# Altium PCB PCB.PcbDoc
Units mil, origin at the board's own origin, x right, y up, seen from the top; angles counter-clockwise.
Board outline 6000 x 4000 mil, 4 copper layers (Top Layer, Int1 (GND), Int2 (PWR), Bottom Layer), stack 53.912 mil thick; 50 components, 40 nets, 243 pads, 0 vias.
Unrouted connection lines stored in the file: 172.
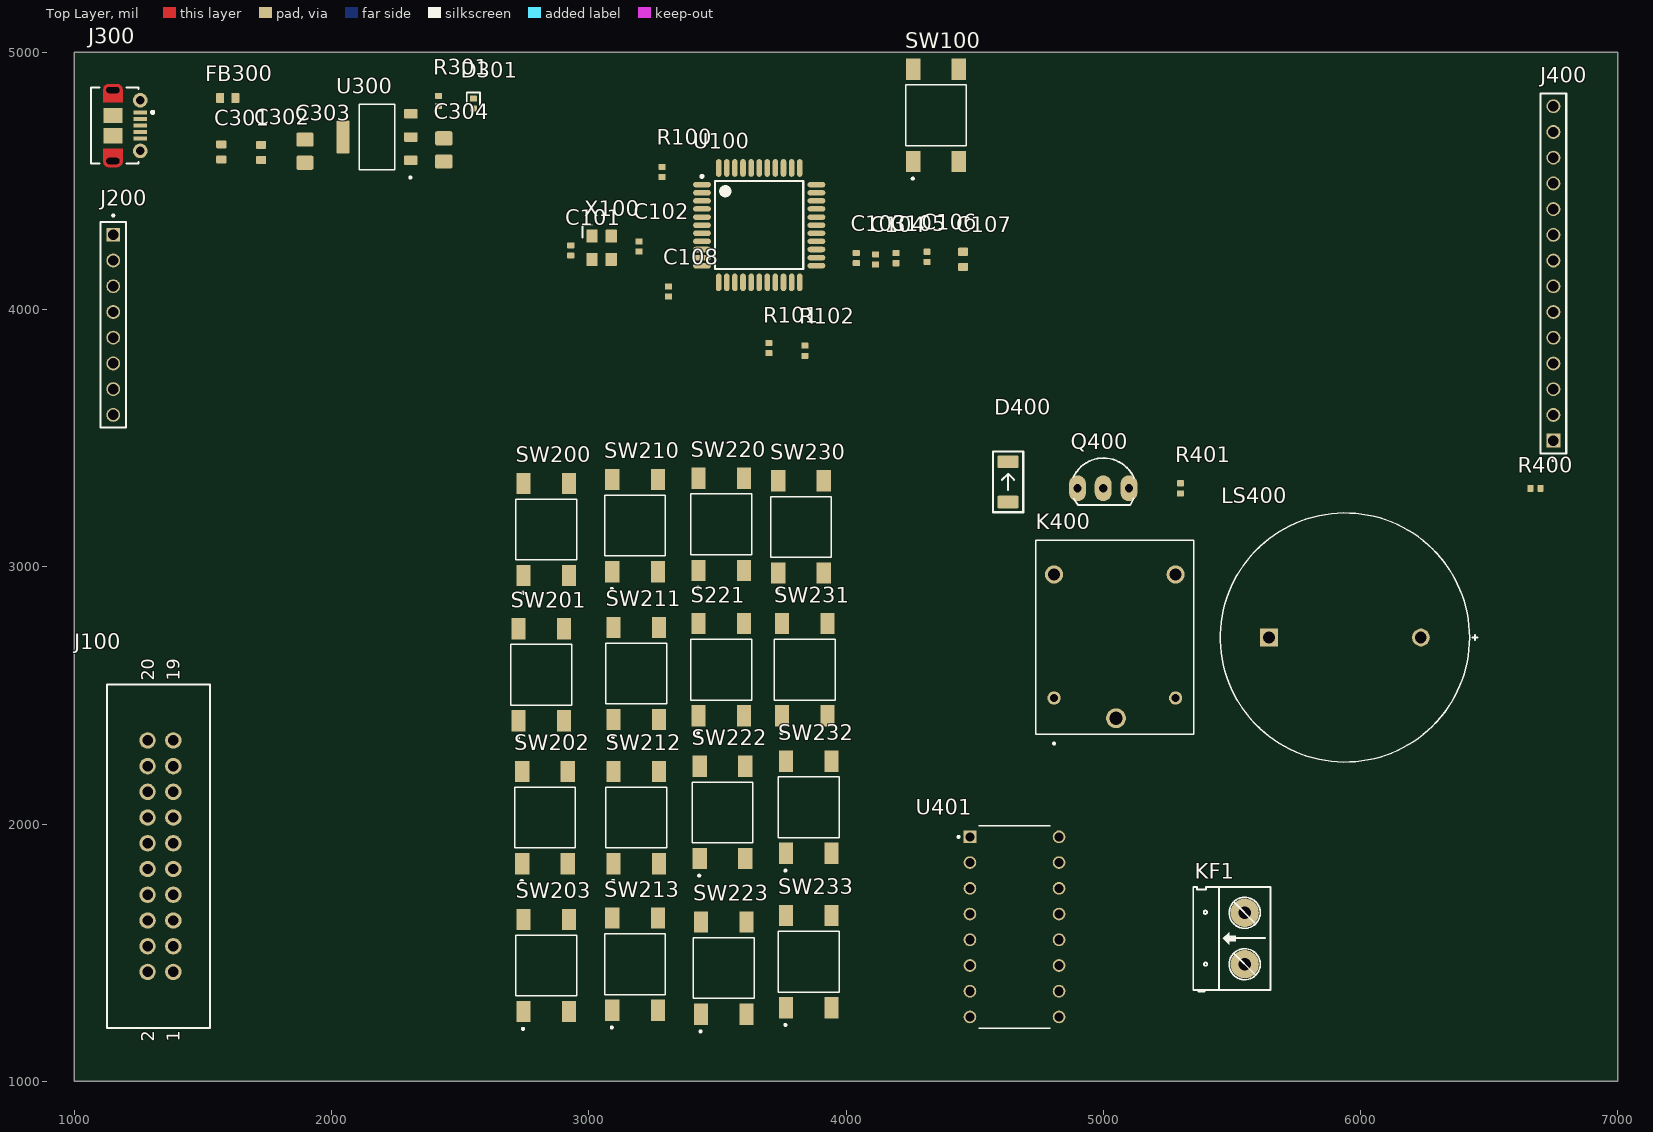
[diagram p0: Top Layer view]
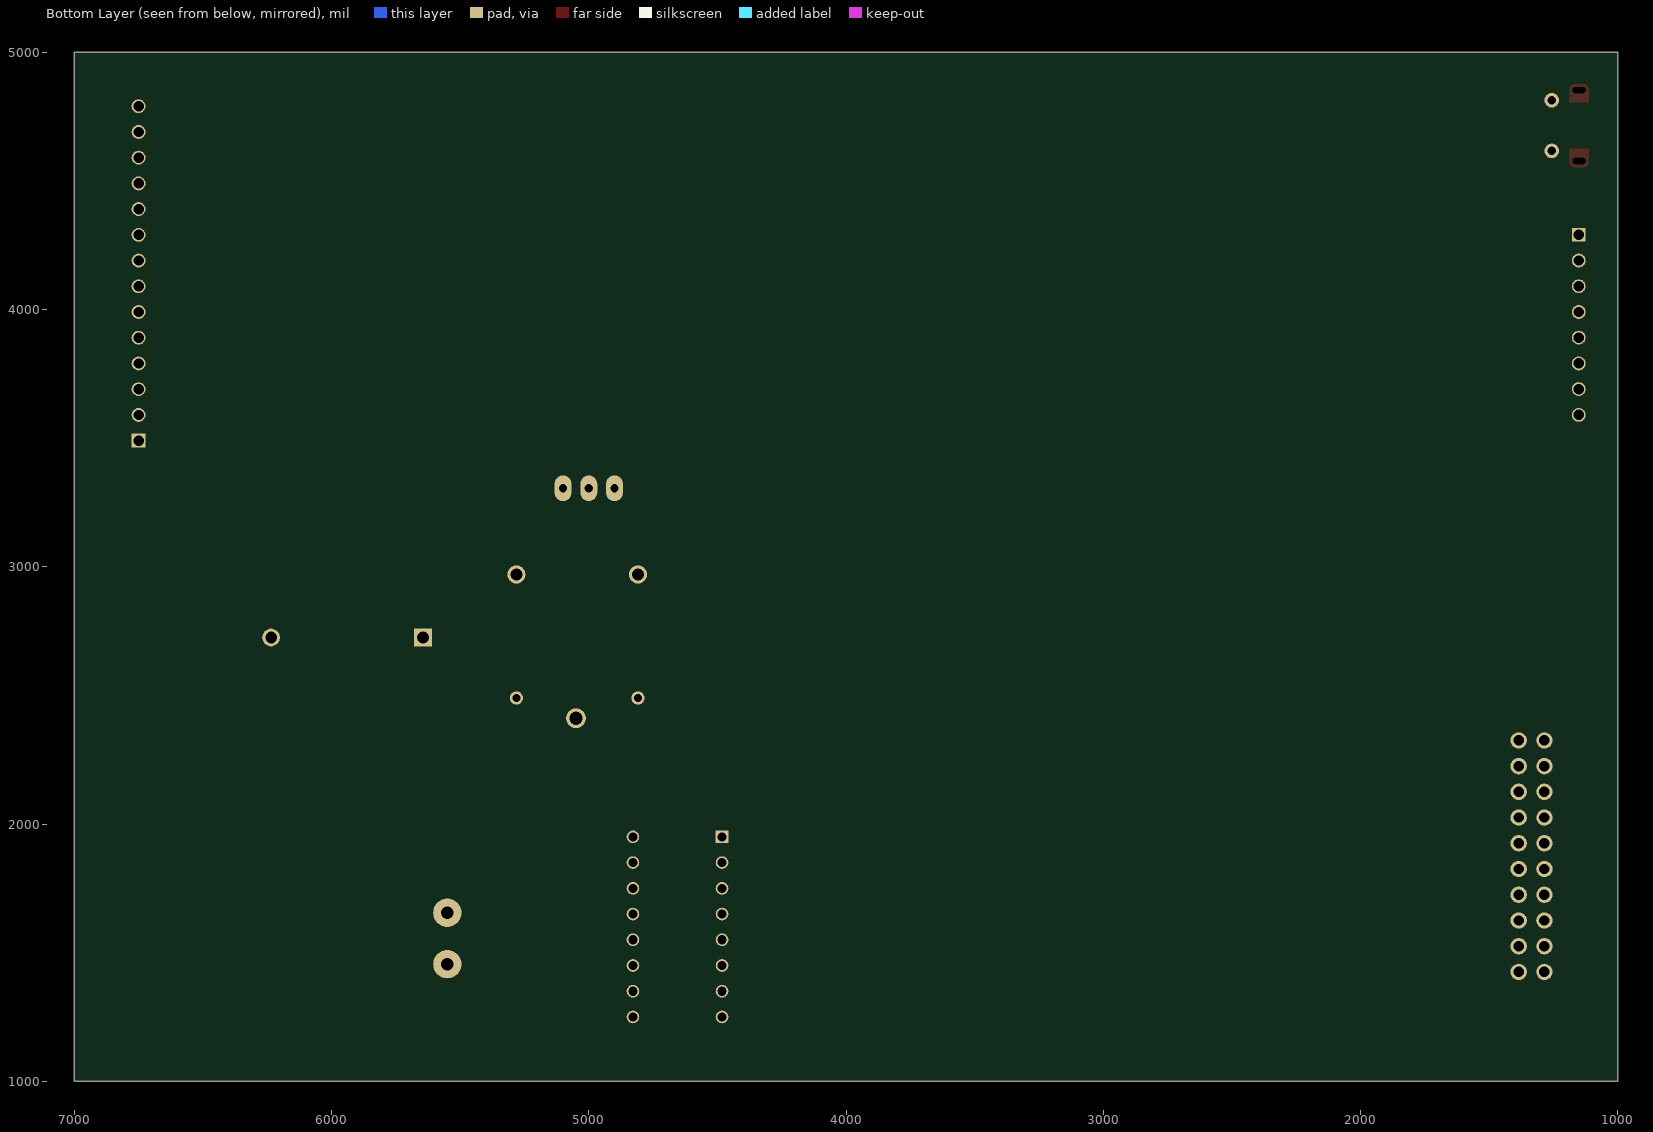
[diagram p1: Bottom Layer view, seen from below]
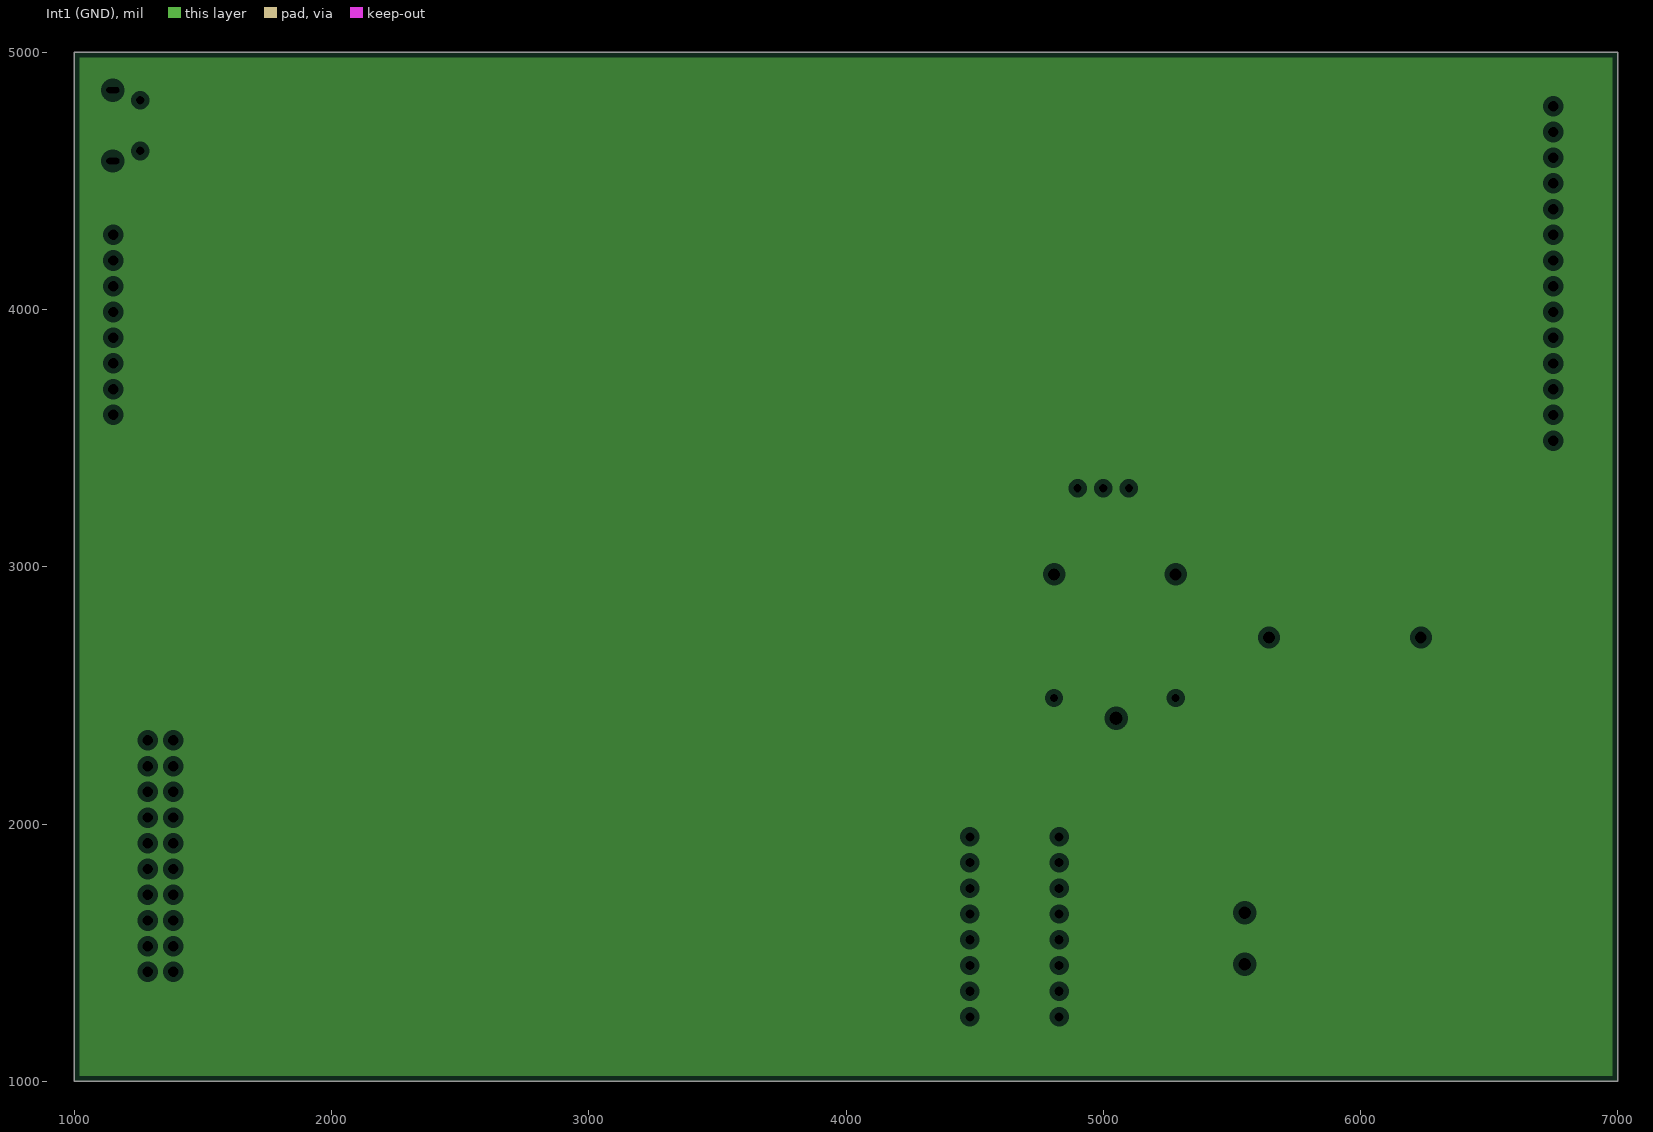
[diagram p2: Int1 (GND), clearances drawn from the general rule]
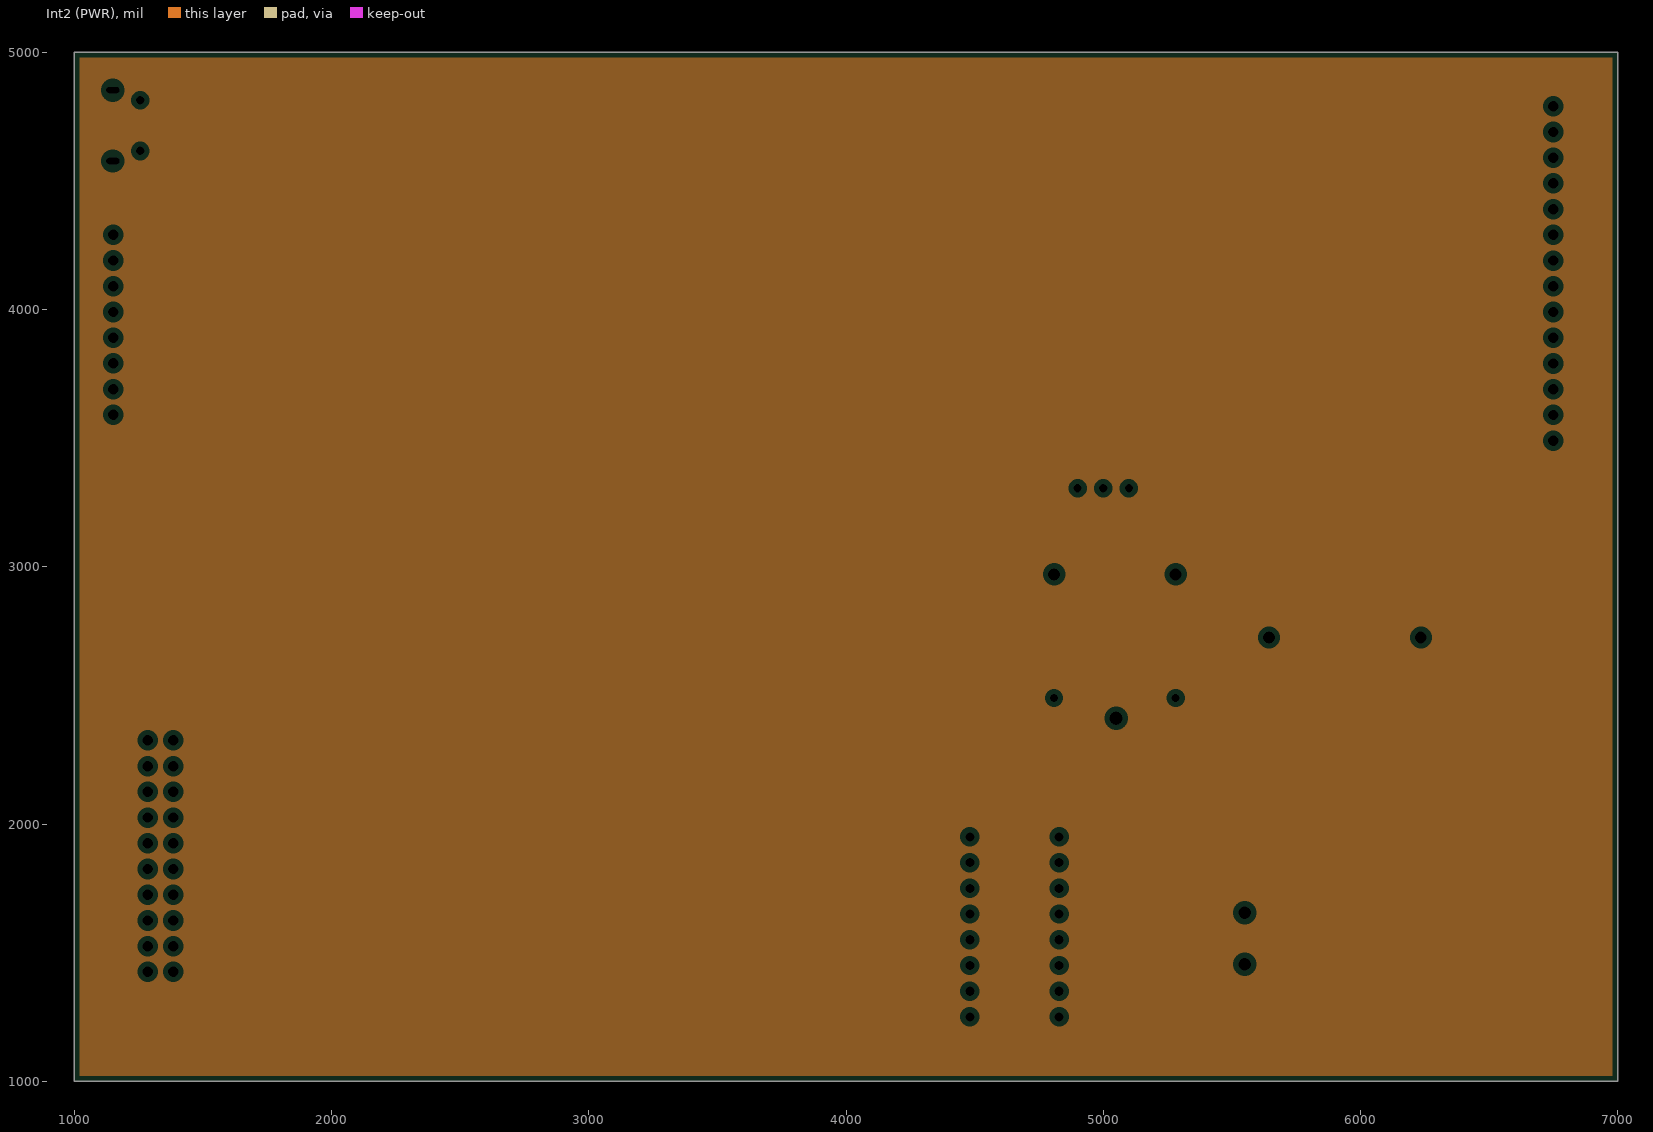
[diagram p3: Int2 (PWR), clearances drawn from the general rule]

## Layer stack, top to bottom
Top Solder: solder mask 1, SM-001, Dk 4
Top Layer: signal copper 1.378
Dielectric 1: prepreg 5.1, PP-017, Dk 4.3
Dielectric 2: prepreg 5.1, PP-017, Dk 4.3
Int1 (GND): plane copper 1.378
Dielectric 3: core 28, Core-039, Dk 4.8
Int2 (PWR): plane copper 1.378
Dielectric 4: prepreg 5.1, PP-017, Dk 4.3
Dielectric 5: prepreg 5.1, PP-017, Dk 4.3
Bottom Layer: signal copper 1.378
Bottom Solder: solder mask 1, SM-001, Dk 4

## Board outline
1000,1000 7000,1000 7000,5000 1000,5000

## Design rules (kind name [scope] priority, off if disabled: settings)
Clearance [All] p1: gap=10 ignorepadtopadclearanceinfootprint=FALSE except(0: Arc-Hole Track-Hole SMDPad-Hole THPad-Hole Via-Hole Fill-Hole Poly-Hole Region-Hole Text-Hole)
PlaneClearance [All] p1: clearance=20
PlaneConnect [All] p1: planeconnectstyle=Relief reliefexpansion=20 reliefentries=4 reliefconductorwidth=10 reliefairgap=10
PolygonConnect [All] p1: connectstyle=Relief reliefconductorwidth=10 reliefentries=4 polygonreliefangle="90 Angle" airgapwidth=10
RoomDefinition SCHEMATIC [InComponentClass('SCHEMATIC')] p1: confinementstyle=ConfineIn formatcopy=TRUE lockcomponents=FALSE outline 960,820.55 6945,820.55 6945,5005.55 960,5005.55
RoutingVias [All] p1: holewidth=28 width=50 viastyle="Through Hole" minholewidth=28 minwidth=50 maxholewidth=28 maxwidth=50
SolderMaskExpansion [All] p1: expansion=4 istentingtop=FALSE
Width [All] p1: maxlimit=10 minlimit=10 preferedwidth=10
28 further rules are at their usual default settings.

## Components (designator, comment, footprint, x,y, rotation, side; value= is the part's Value field where it differs from the comment)
C101 "C0402" CAP_0402 2930,4230 r90 top
C102 "C0402" CAP_0402 3195,4245 r270 top
C103 "C0402" CAP_0402 4040,4200 r270 top
C104 "C0402" CAP_0402 4115,4195 r270 top
C105 "C0402" CAP_0402 4195,4199.69 r270 top
C106 "C0402" CAP_0402 4315,4205 r270 top
C107 "C0603" CAP_0603 4455,4195 r270 top
C108 "C0402" CAP_0402 3310,4070.31 r90 top
C301 "2.2u" CAP_0603 1571.42,4612.72 r90 top
C302 "2.2u" CAP_0603 1726.42,4610.55 r90 top
C303 "22u" CAP_0805 1896.42,4615.55 r90 top
C304 "22u" CAP_0805 2436.42,4620.55 r90 top
D301 "GREEN" LED_0402_GREEN 2551.42,4800.55 r90 top
D400 "D_SMA" "DO-214AC-2 (SMA)" 4630,3330 r90 top
FB300 "120R" FB_0603 1596.42,4822.24 r0 top
J100 "SAMTEC-TST-110-01-X-D" SAMTEC-TST-110-01-X-D 1327.52,1875 r90 top
J200 "HEADER_RFID" SAMTEC_TSW-108-X-X-S 1151.42,3940.55 r90 top
J300 "105017-0001" USB-MICRO-B_V 1203.27,4715.24 r270 top
J400 "HEADER_LCD" SAMTEC_TSW-114-07-L-S 6750,4140.31 r90 top
K400 "SRD-12VDC-SL-C" RELAY_SRD-12VDC-SL-C 5045,2730 r90 top
KF1 "CON 2 KF301" "Con 2 KF301 5.08" 5550,1455 r90 top
LS400 "PKB24SPCH3601-B0" FP-PKB24SPCH3601-B0-MFG 5939.72,2725 r0 top
Q400 "NPN" TO92 5000,3305 r0 top value=C9014
R100 "1k" RES_0402 3285,4535 r90 top
R101 "R0402" RES_0402 3700,3850 r90 top
R102 "R0402" RES_0402 3840,3839.68 r90 top
R301 "1k" RES_0402 2416.42,4810.55 r90 top
R400 "R0402" RES_0402 6680,3305 r180 top
R401 "R0402" RES_0402 5300,3305 r270 top
S221 "3-1437565-0" SW_3-1437565-0 3515,2600 r90 top
SW100 "3-1437565-0" SW_3-1437565-0 4350,4755 r90 top
SW200 "3-1437565-0" SW_3-1437565-0 2835,3145 r90 top
SW201 "3-1437565-0" SW_3-1437565-0 2815,2580 r90 top
SW202 "3-1437565-0" SW_3-1437565-0 2830,2025 r90 top
SW203 "3-1437565-0" SW_3-1437565-0 2835,1450 r90 top
SW210 "3-1437565-0" SW_3-1437565-0 3180,3160 r90 top
SW211 "3-1437565-0" SW_3-1437565-0 3185,2585 r90 top
SW212 "3-1437565-0" SW_3-1437565-0 3185,2025 r90 top
SW213 "3-1437565-0" SW_3-1437565-0 3180,1455 r90 top
SW220 "3-1437565-0" SW_3-1437565-0 3515,3165 r90 top
SW222 "3-1437565-0" SW_3-1437565-0 3520,2045 r90 top
SW223 "3-1437565-0" SW_3-1437565-0 3525,1440 r90 top
SW230 "3-1437565-0" SW_3-1437565-0 3825,3155 r90 top
SW231 "3-1437565-0" SW_3-1437565-0 3840,2600 r90 top
SW232 "3-1437565-0" SW_3-1437565-0 3855,2065 r90 top
SW233 "3-1437565-0" SW_3-1437565-0 3855,1465 r90 top
U100 "ATmega32-16AU" 44A_N 3662.56,4327.99 r0 top
U300 "AMS1117-5.0" SOT229P700X180-4N 2176.42,4670.55 r90 top
U401 "L293D" DIP880W50P254L2000H510Q16 4655,1600 r0 top
X100 "24MHz" XTAL_3225 3050,4240 r270 top

## Footprints (in the part's own frame and the unit in brackets; to place one, negate y for a bottom-side part, rotate by r counter-clockwise, add the part's x,y. Pads: shape width x height; smd on the part's side, far side on the other; paste and mask are expansions set on the pad)
44A_N [mm] "Thin QFP, 44-Leads, Body 10x10mm, Pitch 0.8mm, IPC Medium Density"
  oval 1.75x0.55 smd: 1(-5.65,4) 2(-5.65,3.2) 3(-5.65,2.4) 4(-5.65,1.6) 5(-5.65,0.8) 6(-5.65,0) 7(-5.65,-0.8) 8(-5.65,-1.6) 9(-5.65,-2.4) 10(-5.65,-3.2) 11(-5.65,-4) 23(5.65,-4) 24(5.65,-3.2) 25(5.65,-2.4) 26(5.65,-1.6) 27(5.65,-0.8) 28(5.65,0) 29(5.65,0.8) 30(5.65,1.6) 31(5.65,2.4) 32(5.65,3.2) 33(5.65,4)
  oval 0.55x1.75 smd: 12(-4,-5.65) 13(-3.2,-5.65) 14(-2.4,-5.65) 15(-1.6,-5.65) 16(-0.8,-5.65) 17(0,-5.65) 18(0.8,-5.65) 19(1.6,-5.65) 20(2.4,-5.65) 21(3.2,-5.65) 22(4,-5.65) 34(4,5.65) 35(3.2,5.65) 36(2.4,5.65) 37(1.6,5.65) 38(0.8,5.65) 39(0,5.65) 40(-0.8,5.65) 41(-1.6,5.65) 42(-2.4,5.65) 43(-3.2,5.65) 44(-4,5.65)
  silkscreen extent -5.77,-4.35 4.35,4.95, body extent -5,-5 5,5, height 1.2
CAP_0402 [mm]
  rrect25% 0.6x0.7 smd: 1(-0.5,0) 2(0.5,0)
  body extent -0.5,-0.26 0.5,0.26, height 0.37
CAP_0603 [mm]
  rrect25% 0.8x1 smd: 1(-0.75,0) 2(0.75,0)
  body extent -0.8,-0.4 0.8,0.4, height 0.51
CAP_0805 [mm]
  rrect25% 1.4x1.7 smd: 1(-1.143,0) 2(1.143,0)
  body extent -1.15,-0.76 1.15,0.79, height 1.01
"Con 2 KF301 5.08" [mil]
  round 110 hole 50: 1(0,0) 2(200,0)
  silkscreen extent -106,-100 300,200, body extent -45,-97 255,190, height 335
DIP880W50P254L2000H510Q16 [mm]
  rect 1.25x1.25 / inner round 1.25 / far side rect 1.25x1.25 hole 0.9: 1(-4.4,8.89)
  round 1.25 hole 0.9: 2(-4.4,6.35) 3(-4.4,3.81) 4(-4.4,1.27) 5(-4.4,-1.27) 6(-4.4,-3.81) 7(-4.4,-6.35) 8(-4.4,-8.89) 9(4.4,-8.89) 10(4.4,-6.35) 11(4.4,-3.81) 12(4.4,-1.27) 13(4.4,1.27) 14(4.4,3.81) 15(4.4,6.35) 16(4.4,8.89)
  silkscreen extent -5.62,-10 3.55,10, body extent -10,-4.62 10,4.62, height 5.1
"DO-214AC-2 (SMA)" [mm]
  rrect25% 1.27x2.1 smd: A(-1.985,0) K(1.985,0)
  silkscreen extent -3,-1.5 3,1.5, body extent -2.6,-1.3 2.6,1.3, height 2.42
FB_0603 [mm]
  rrect25% 0.8x1 smd: 1(-0.75,0) 2(0.75,0)
  body extent -0.8,-0.4 0.8,0.4, height 0.81
FP-PKB24SPCH3601-B0-MFG [mm]
  rect 1.75x1.75 hole 1.15 paste-1000 mask+0: 1(-7.5,0)
  round 1.75 hole 1.15 paste-1000 mask+0: 2(7.5,0)
  silkscreen extent -12.3,-12.3 13.1,12.3, body extent -12.4,-12.4 12.4,12.4, height 0.25
LED_0402_GREEN [mm]
  rrect25% 0.6x0.7 smd: A(-0.5,0) K(0.5,0)
  silkscreen extent -0.15,-0.65 1.1,0.65, body extent -0.51,-0.25 0.51,0.25, height 0.45
RELAY_SRD-12VDC-SL-C [mm]
  round 1.308 hole 0.8: COIL1(-6.1,6) COIL2(-6.1,-6)
  round 1.95 hole 1.3: COM(-8.1,-0.12)
  round 1.8 hole 1.2: NC(6.1,6) NO(6.1,-6)
  silkscreen extent -10.7,-7.8 9.5,7.8
RES_0402 [mm]
  rrect25% 0.6x0.7 smd: 1(-0.5,0) 2(0.5,0)
  body extent -0.5,-0.25 0.5,0.25, height 0.3
SAMTEC-TST-110-01-X-D [mm]
  round 1.62 hole 1.02 mask+0: 1(-11.43,-1.46) 2(-11.43,1.08) 3(-8.89,-1.46) 4(-8.89,1.08) 5(-6.35,-1.46) 6(-6.35,1.08) 7(-3.81,-1.46) 8(-3.81,1.08) 9(-1.27,-1.46) 10(-1.27,1.08) 11(1.27,-1.46) 12(1.27,1.08) 13(3.81,-1.46) 14(3.81,1.08) 15(6.35,-1.46) 16(6.35,1.08) 17(8.89,-1.46) 18(8.89,1.08) 19(11.43,-1.46) 20(11.43,1.08)
  silkscreen extent -16.96,-5.09 16.96,5.09
SAMTEC_TSW-108-X-X-S [mm]
  rect 1.37x1.37 / inner round 1.37 / far side rect 1.37x1.37 hole 1.02: 01(8.89,0)
  round 1.37 hole 1.02: 02(6.35,0) 03(3.81,0) 04(1.27,0) 05(-1.27,0) 06(-3.81,0) 07(-6.35,0) 08(-8.89,0)
  silkscreen extent -10.16,-1.27 10.9,1.27
SAMTEC_TSW-114-07-L-S [mm]
  rect 1.37x1.37 / inner round 1.37 / far side rect 1.37x1.37 hole 1.02: 01(-16.51,0)
  round 1.37 hole 1.02: 02(-13.97,0) 03(-11.43,0) 04(-8.89,0) 05(-6.35,0) 06(-3.81,0) 07(-1.27,0) 08(1.27,0) 09(3.81,0) 10(6.35,0) 11(8.89,0) 12(11.43,0) 13(13.97,0) 14(16.51,0)
  silkscreen extent -18.53,-1.27 17.78,1.27
SOT229P700X180-4N [mm]
  rrect15% 0.93x1.31 smd: 1(-2.29,-3.345) 2(0,-3.345) 3(2.29,-3.345)
  rrect15% 3.24x1.31 smd: 4(0,3.345)
  silkscreen extent -4.09,-3.4 3.25,1.75, body extent -3.25,-3.5 3.25,3.5, height 1.8
SW_3-1437565-0 [mm]
  rect 2.1x1.4 smd: 1(-4.55,2.25) 2(4.55,2.25) 3(-4.55,-2.25) 4(4.55,-2.25)
  silkscreen extent -6.35,-3 3,3
TO92 [mil] "TO-92"
  oval 66x100 hole 32: 1(-100,0) 2(0,0) 3(100,0)
  silkscreen extent -117,-65 120,118, body extent -109,-66 109,95, height 245
USB-MICRO-B_V [mm] "USB, MICRO B, Body 7.491x4.695 mm, Pitch 0.65 mm"
  rect 0.4x1.35 smd: 1(-1.3,1.35) 2(-0.65,1.35) 3(0,1.35) 4(0.65,1.35) 5(1.3,1.35)
  round 1.45 hole 0.85: 6(-2.5,1.35) 7(2.5,1.35)
  rrect50% 0x0 hole 0.6 slot 1.3 at 90 deg: 8(-3.5,-1.35) 11(3.5,-1.35)
  rect 1.5x1.9 smd: 9(-1,-1.35) 10(1,-1.35)
  Top Layer circle w0.5: c3.6,-0.9 r0.25
  Top Layer circle w0.5: c3.6,-1.8 r0.25
  Top Layer circle w0.5: c-3.6,-0.9 r0.25
  Top Layer circle w0.5: c-3.6,-1.8 r0.25
  Top Layer region: -2.3,-2.3 -2.3,-0.4 -3.6,-0.4 -3.6,-2.3
  Top Layer region: 2.3,-0.4 2.3,-2.3 3.6,-2.3 3.6,-0.4
  Top Layer region: 3.6,-0.9 3.6,-1.8 4.1,-1.8 4.1,-0.9
  Top Layer region: -3.6,-1.8 -3.6,-0.9 -4.1,-0.9 -4.1,-1.8
  silkscreen extent -3.75,-3.5 3.75,2.7, body extent -4.1,-3.9 4.1,1.5, height 2.67
XTAL_3225 [mm]
  rrect10% 1.3x1.1 smd: 1(-1.15,-0.95) 2(1.15,-0.95) 3(1.15,0.95) 4(-1.15,0.95)
  silkscreen extent -2.23,-1.89 -1,-1, body extent -1.6,-1.28 1.6,1.22, height 0.61

## Part data
C101 C102 C103 C104 C105 C106 C108: library part CAP_0402, "Capacitor SMD 0402"
C107 C301 C302: library part CAP_0603, "Capacitor SMD 0603"
C303 C304: library part CAP_0805, "Capacitor SMD 0805"
D301: library part LED_0402_GREEN, "LED 0402 GREEN SMD"
D400: "Diode SMD SMA (DO-214AA)"
FB300: library part FB_0603, "Ferrite Bead SMD 0603"
J100: Package=None, Availability=Unavailable, MF=Samtec, MP=SAMTEC-TST-110-01-X-D, Price=None
J200: library part TSW-108-X-X-S, "Connector Header Through Hole 8 position 0.100 (2.54mm)", Package=None, Check_prices=https://www.snapeda.com/parts/TSW-108-23-L-S/Samtec/view-part/?ref=eda, MF=Samtec, MP=TSW-108-23-L-S, SnapEDA_Link=https://www.snapeda.com/parts/TSW-108-23-L-S/Samtec/view-part/?ref=snap
J300: library part CMP-2000-05827-1, "Micro-USB B Receptacle, Right Angle, Bottom Mount, Surface Mount, with Solder Tabs, -30 to 85 degC, 5-Pin USB, RoHS, Tape and Reel", Manufacturer=Molex, Package Description="5-Leads USB, Micro B, Body 7.5 x 5 mm, Pitch 0.65 mm", Package Reference=MICRO-B, Package Version="Rev. F, 12/2012", Standard Package=1, Voltage - Max=30V, 3D Model=105017-0001.stp, Catalog Drawings=1050170001, Category=Connectors,Interconnects, Circuits=5, Connector Type=USB-microB, Datasheet URL=http://www.molex.com/elqNow/elqRedir.htm?ref=http://www.molex.com/webdocs/datasheets/pdf/en-us/1050170001_IO_CONNECTORS.pdf, Datasheet Version=03/2016, Family=USB,DVI,HDMIConnectors, Featured Product=Micro-USBConnectorsUSBConnectors, Features=Shielded,SolderRetention, Gender=Receptacle, Ingress Protection=-, Manufacturer URL=http://www.molex.com/, Mating Products=WM17145-ND-CABLEMICROUSBBTOSTDA1.0MWM17147-ND-CABLEMICROUSBBTOSTDA2.0MWM17146-ND-CABLEMICROUSBBTOSTDA1.5M, Mounting Technology=SurfaceMount, Mounting Type=BoardCutout,SurfaceMount,RightAngle, Number Of Contacts=5, Online Catalog=Molex-MicroUSB, Other Names=WM1399DKR, Package URL=http://www.molex.com/pdm_docs/sd/1050170001_sd.pdf, Packaging=Digi-Reel®, PCN Assembly/Origin=ResinSupplier21/Oct/2015, RoHS Information=1050170001CertofCompliance, Series=-, Specifications=-
J400: library part TSW-114-07-L-S, "Connector Header Through Hole 14 position 0.100 (2.54mm)", Package=None, Check_prices=https://www.snapeda.com/parts/TSW-114-07-L-S/Samtec+Inc./view-part/?ref=eda, MF="Samtec Inc.", MP=TSW-114-07-L-S, SnapEDA_Link=https://www.snapeda.com/parts/TSW-114-07-L-S/Samtec+Inc./view-part/?ref=snap
K400: "General Purpose Non Latching 12VDC SPDT Through Hole Relays RoHS", Package=None, Availability=Unavailable, MP=SRD-12VDC-SL-C, Price=None
KF1: "Cắm", Chung_Loai=Cắm, Don_Vi=Con, Ma_Hang=MH000987, Ten_Linh_Kien="CON 2 KF301-2P 5.08MM Xanh Dương"
LS400: library part CMP-06203-000001-2, "AUDIO PIEZO TRANSDUCER 3-15V TH", Frequency=3.6kHz, Max Frequency=4.1kHz, Max Operating Temperature=70°C, Max Supply Current=16mA, Max Supply Voltage=15V, Min Operating Temperature=-20°C, Min Supply Voltage=3V, Nominal Supply Voltage (DC)=12V, Package Quantity=650, Diameter=24.3mm, Height=9.7mm, Lead Free="Lead Free", Length=24.3mm, Max Supply Voltage (DC)=15V, Min Supply Voltage (DC)=3V, Mount=Flush, Nominal Supply Current=16mA, Operating Supply Current=16mA, Packaging=Bulk, Radiation Hardening=No, REACH SVHC="No SVHC", Self Resonant Frequency=3.6kHz, Termination="PC Pins", Voltage Rating=12V, Voltage Rating (DC)=15V, Washable=No
Q400: library part "Trans 2N3904", "NPN transistor EBC"
R100 R101 R102 R301 R400 R401: library part RES_0402, "Resistor SMD 0402"
S221 SW100 SW200 SW201 SW202 SW203 SW210 SW211 SW212 SW213 SW220 SW222 SW223 SW230 SW231 SW232 SW233: "Switch Tactile OFF (ON) SPST Round Button Gull Wing 0.05A 24VDC 1VA 9.18N SMD T/R", Package="SMD-6 Omron Electronics", Availability=Good, MF="TE Connectivity", MP=3-1437565-0, Price=None, Purchase-URL=https://pricing.snapeda.com/search/part/3-1437565-0/?ref=eda, SnapEDA_Link=https://www.snapeda.com/parts/3-1437565-0/TE%20Connectivity/view-part/294084/?ref=snap
U100: library part CMP-0095-00554-1, "8-bit AVR Microcontroller, 4.5-5.5V, 16MHz, 32KB Flash, 1024 Bytes EEPROM, 2KB SRAM, 44-pin TQFP, Industrial Grade (-40°C to 85°C)", Code_JEDEC=MS-026-ACB, ComponentLink1Description="Manufacturer URL", ComponentLink1URL=http://www.atmel.com/, ComponentLink2Description="ATmega32(L) Datasheet", ComponentLink2URL=http://atmel.com/dyn/resources/prod_documents/doc2503.pdf, ComponentLink3Description="ATmega32(L) Summary", ComponentLink3URL=http://atmel.com/dyn/resources/prod_documents/2503S.pdf, DatasheetVersion="revQ, Feb-2011", PackageDescription="44-Pin Plastic Thin Profile Quad Flat Pack, 10 x 10 x 1.0 mm Body, 0.8 mm Pitch (TQFP)", PackageReference=44A, PackageVersion="revC, Oct-2010"
U300: "1A LOW DROPOUT VOLTAGE REGULATOR", Package="SOT-223 Seeed Technology", Availability="Not in stock", Check_prices=https://www.snapeda.com/parts/AMS1117-5.0/ams/view-part/?ref=eda, MF=ams, MP=AMS1117-5.0, Price=None, SnapEDA_Link=https://www.snapeda.com/parts/AMS1117-5.0/ams/view-part/?ref=snap
U401: "Bipolar Motor Driver - Parallel 16-PowerDIP", Package="DIP-16 STMicroelectronics", Availability="In Stock", Check_prices=https://www.snapeda.com/parts/L293D/STMicroelectronics/view-part/?ref=eda, MF=STMicroelectronics, MP=L293D, Price=None, Purchase-URL=https://pricing.snapeda.com/search/part/L293D/?ref=eda, SnapEDA_Link=https://www.snapeda.com/parts/L293D/STMicroelectronics/view-part/?ref=snap
X100: library part TSX-3225_24.0000MF15X-AC, "Crystal SMD 24MHz 10PPM 7pF 3225", Manufacturer=Epson, Manufacturer Part Number="TSX-3225 24.0000MF15X-AC"

## Nets (pads, with @x,y where several pads share a name; then routed paths per layer and width w, separated by ;. In a path a pad name is that pad's centre, name@x,y a point inside that pad or via, vN(x,y) a via of type N, cw(c..) or ccw(c..) an arc to the next point about the centre after c; other vN are vias at no path point)
+12: C302.2 C303.2 D400.K FB300.2 K400.COIL1 K400.COM U300.3 U401.1 U401.8 U401.9
BUZZER: R401.1 U100.13
COL0: J100.13 SW200.3 SW200.4 SW201.3 SW201.4 SW202.3 SW202.4 SW203.3 SW203.4 U100.23
COL1: SW210.3 SW210.4 SW211.3 SW211.4 SW212.3 SW212.4 SW213.3 SW213.4 U100.24
COL2: J100.5 S221.3 S221.4 SW220.3 SW220.4 SW222.3 SW222.4 SW223.3 SW223.4 U100.25
COL3: SW230.3 SW230.4 SW231.3 SW231.4 SW232.3 SW232.4 SW233.3 SW233.4 U100.26
GND: C101.1 C102.1 C103.1 C104.1 C105.1 C106.1 C107.1 C108.1 C301.1 C302.1 C303.1 C304.1 J100.2 J100.4 J100.6 J100.8 J100.10 J100.12 J100.14 J100.16 J100.18 J100.20 J200.06 J300.5 J400.01 LS400.2 Q400.1 R301.1 R400.1 SW100.1 SW100.2 U100.6 U100.18 U100.28 U100.39 U300.1 U401.4 U401.5 U401.12 U401.13 X100.2 X100.4
INPUT1: U100.11 U401.2
INPUT2: U100.12 U401.7
LCD_D1: J400.11 U100.33
LCD_D2: J400.12 U100.32
LCD_D3: J400.13 U100.31
LCD_D4: J400.14 U100.30
LCD_E: J400.06 U100.35
LCD_RS: J400.04 U100.37
LCD_RW: J400.05 U100.36
LED_PWR_K: D301.K R301.2
MISO: J200.04 U100.2
MOSI: J200.03 U100.1
NetC108_2: C108.2 U100.29
NetD400_A: D400.A K400.COIL2 Q400.3
NetK400_NO: K400.NO LS400.1
NetKF1_1: KF1.1 U401.6
NetKF1_2: KF1.2 U401.3
NetQ400_2: Q400.2 R401.2
NetR100_1: R100.1 SW100.3 SW100.4 U100.4
ROW0: SW200.1 SW200.2 SW210.1 SW210.2 SW220.1 SW220.2 SW230.1 SW230.2 U100.40
ROW1: S221.1 S221.2 SW201.1 SW201.2 SW211.1 SW211.2 SW231.1 SW231.2 U100.41
ROW2: SW202.1 SW202.2 SW212.1 SW212.2 SW222.1 SW222.2 SW232.1 SW232.2 U100.42
ROW3: SW203.1 SW203.2 SW213.1 SW213.2 SW223.1 SW223.2 SW233.1 SW233.2 U100.43
SCK: J200.02 U100.3
SCL: R101.1 U100.19
SDA: R102.1 U100.20
SS: J200.01 U100.44
TCK: J100.11 U100.21
TMS: J100.7 U100.22
VBUS: C301.2 FB300.1 J300.1
VOUT: C103.2 C104.2 C105.2 C106.2 C107.2 C304.2 D301.A J100.1 J100.19 J200.08 J400.02 J400.03 R100.2 R101.2 R102.2 R400.2 U100.5 U100.17 U100.27 U100.38 U300.2 U401.16
XTAL1: C102.2 U100.8 X100.3
XTAL2: C101.2 U100.7 X100.1
pads on no net: J100.3 J100.9 J100.15 J100.17 J200.05 J200.07 J300.2 J300.3 J300.4 J300.6 J300.7 J300.8 J300.9 J300.10 J300.11 J400.07 J400.08 J400.09 J400.10 K400.NC U100.9 U100.10 U100.14 U100.15 U100.16 U100.34 U300.4 U401.10 U401.11 U401.14 U401.15

## Polygon pours and split planes (outlines as drawn)
no net on Int1 (GND) (split plane): 6979.9,1020.1 1020.1,1020.1 1020.1,4979.9 6979.9,4979.9
no net on Int2 (PWR) (split plane): 6979.9,1020.1 1020.1,1020.1 1020.1,4979.9 6979.9,4979.9

## Text inside footprints (layer, text, board x,y; h text height)
D301: Mechanical 13 "+" at 2531.4,4726.41 h19.68 r90
J100: Mechanical 13 "20" at 1310.04,2556.14 h50 r90; Mechanical 13 "19" at 1410.04,2556.14 h50 r90; Mechanical 13 "30.480" at 1023.03,1843.5 h10 r90; Mechanical 13 "22.860" at 1057.52,1843.5 h10 r90; Mechanical 13 "33.020" at 1642.01,1843.5 h10 r90; Mechanical 13 "2.540" at 1092.52,1321.5 h10 r90; Mechanical 13 "9.271" at 1332.52,1072.01 h10 r90; Mechanical 13 "2.540" at 1332.52,1144.02 h10 r90; Mechanical 13 "2" at 1310.04,1153.35 h50 r90; Mechanical 13 "1" at 1410.04,1153.35 h50 r90; Top Overlay "20" at 1310.04,2556.14 h50 r90; Top Overlay "19" at 1410.04,2556.14 h50 r90; Top Overlay "2" at 1310.04,1153.35 h50 r90; Top Overlay "1" at 1410.04,1153.35 h50 r90
J300: Mechanical 1 "PCB EDGE" at 1089.09,4998.7 h11.81 r270